# Altium PCB ProjectY_PCB.PcbDoc
Units mm, origin at the board's own origin, x right, y up, seen from the top; angles counter-clockwise.
Board outline 30 x 30 mm, 2 copper layers (Top Layer, Bottom Layer), stack 1.51 mm thick; 9 components, 7 nets, 26 pads, 0 vias.
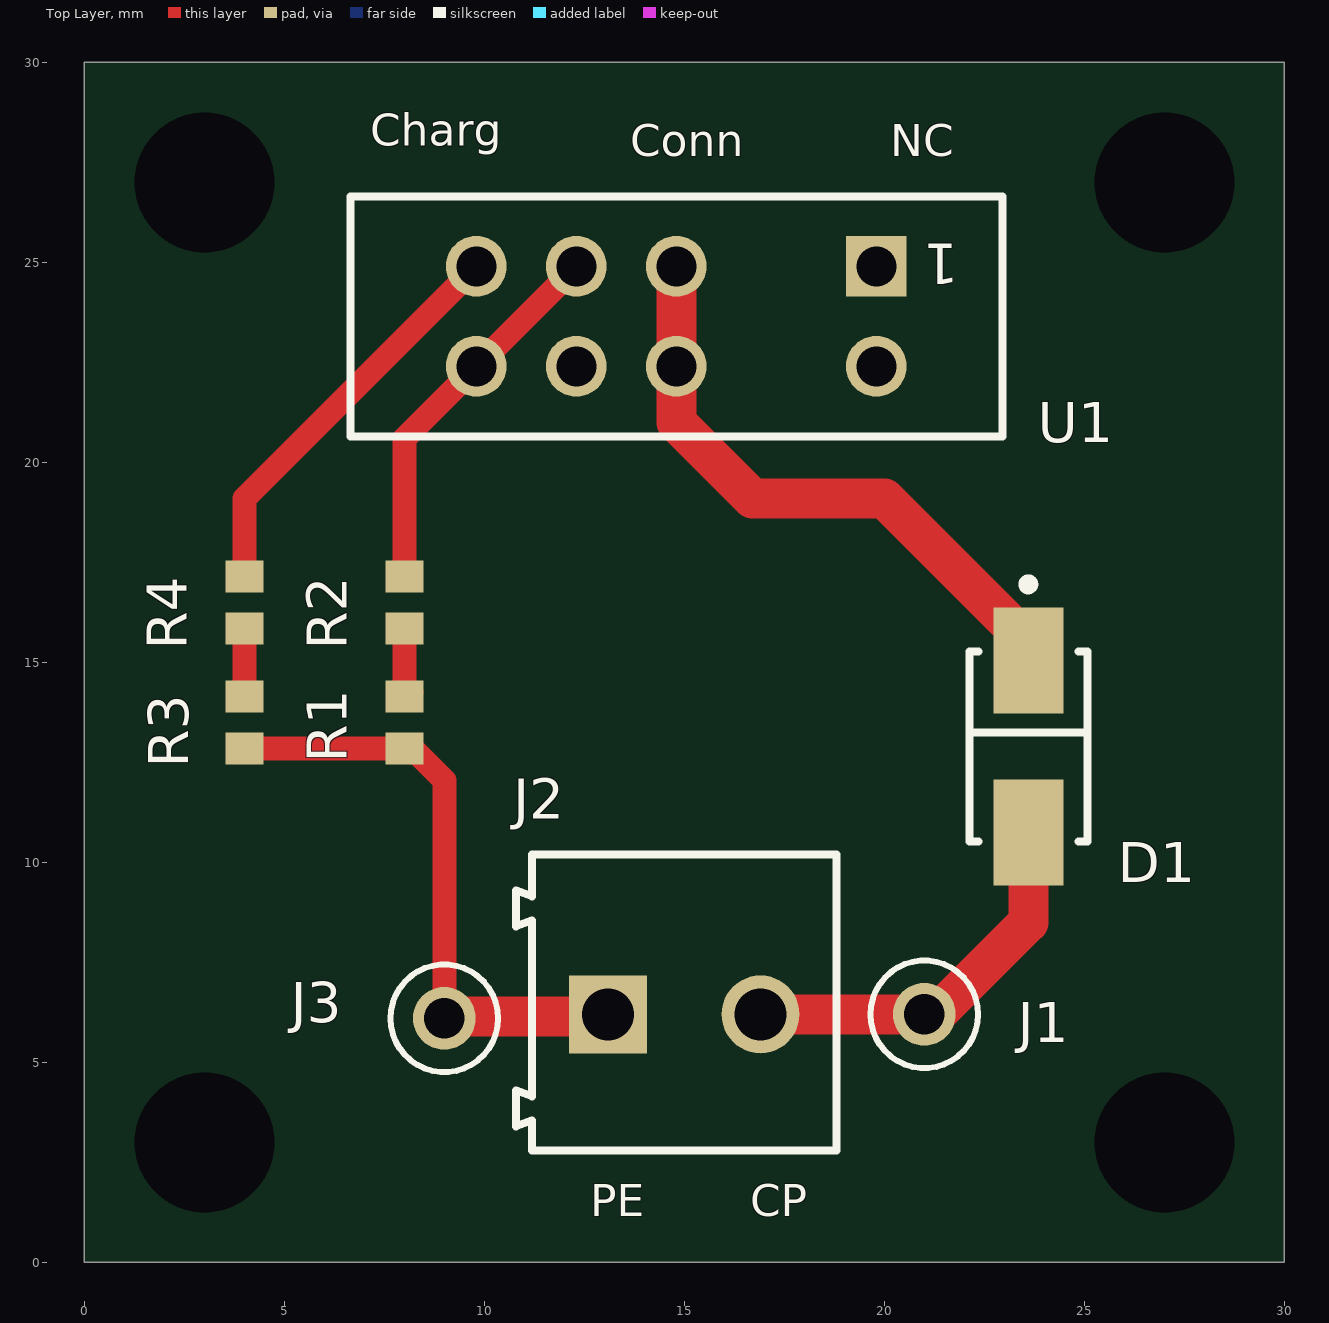
[diagram p0: Top Layer view]
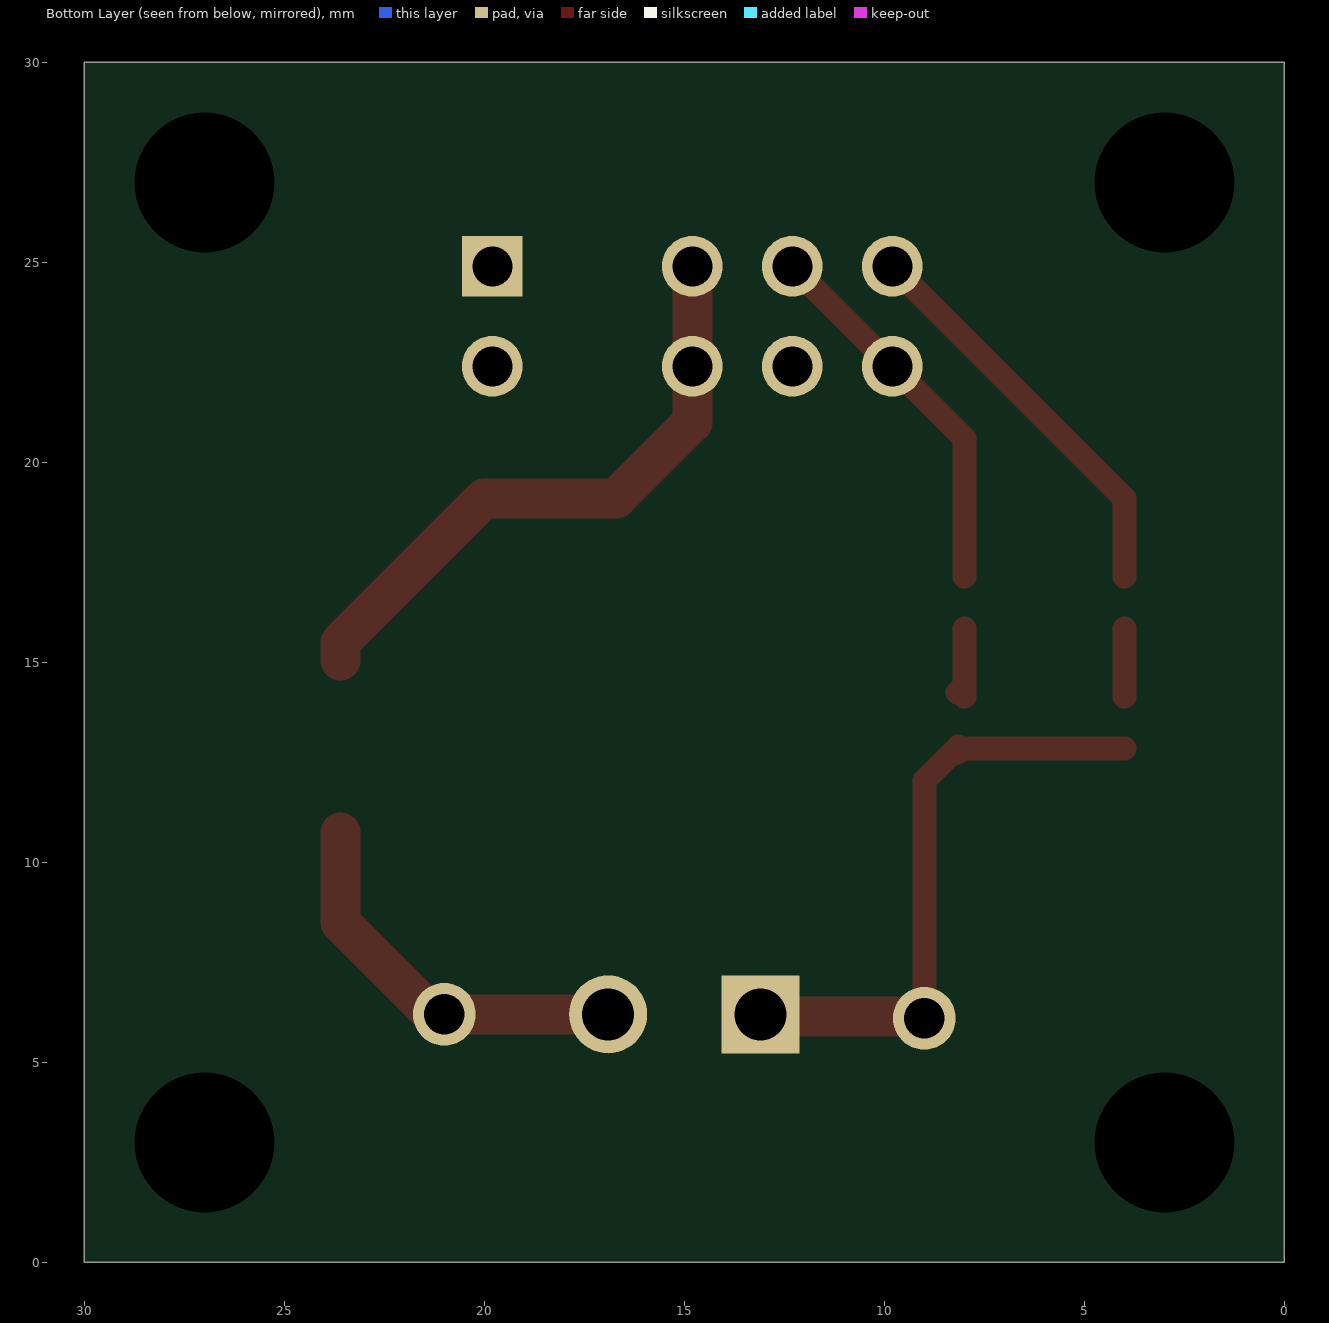
[diagram p1: Bottom Layer view, seen from below]
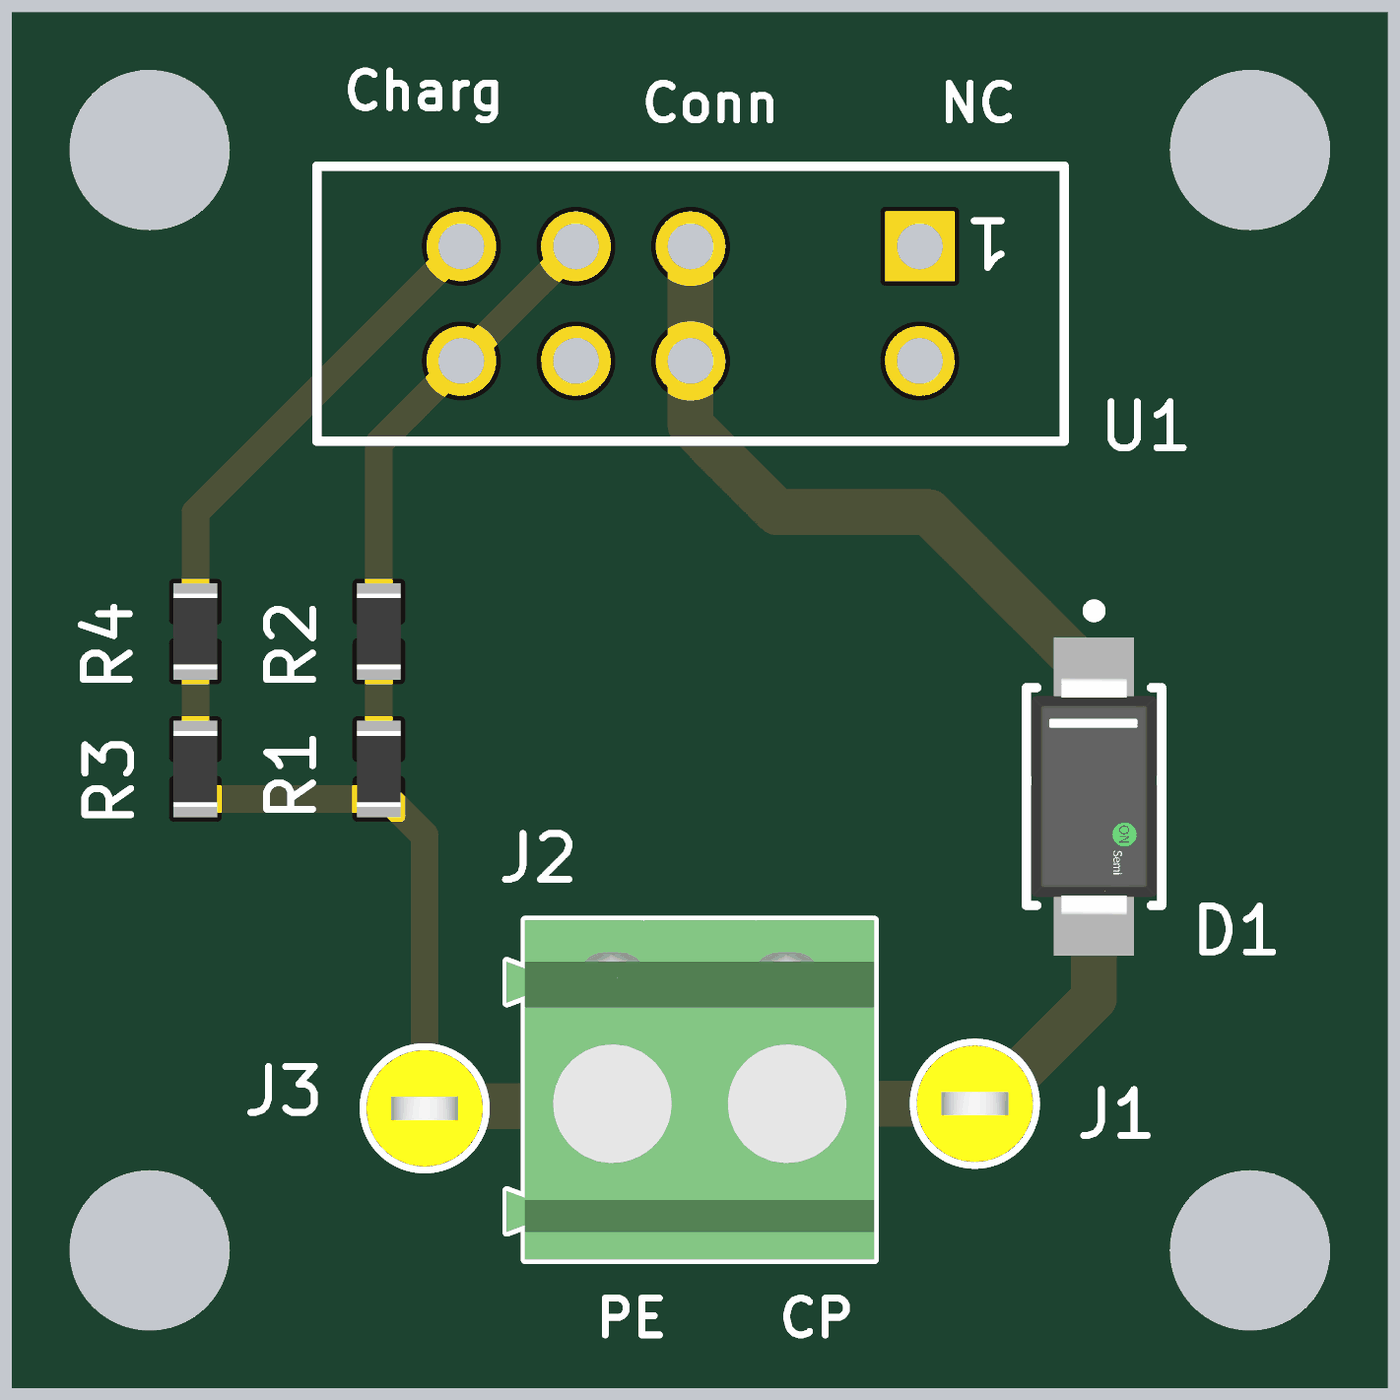
[diagram p2: 3D render of the assembled board from above, using the file's embedded part models]

## Layer stack, top to bottom
Top Solder: solder mask 0.0254, SM-001, Dk 4
Top Layer: signal copper 0.035
Dielectric 1: core 1.44, Core-043, Dk 4.3
Bottom Layer: signal copper 0.035
Bottom Solder: solder mask 0.0254, SM-001, Dk 4

## Board outline
0,0 30,0 30,30 0,30

## Design rules (kind name [scope] priority, off if disabled: settings)
AcuteAngle [All] p1: minimum=4.50000000000000E+0001 checktracksonly=FALSE
BoardOutlineClearance [All] p1: gap=0.2 ignorepadtopadclearanceinfootprint=FALSE
Clearance Clearance_1 [InNet('NO') vs InNet('NC')Or InNet('C')] p1: gap=1.1 ignorepadtopadclearanceinfootprint=FALSE
Clearance Clearance_2 [InNet('NC') vs InNet('NO') OR InNet('C')] p2: gap=1.1 ignorepadtopadclearanceinfootprint=FALSE
Clearance Clearance_3 [InNet('C') vs InNet('NO')OR InNet('NC')] p3: gap=1.1 ignorepadtopadclearanceinfootprint=FALSE
Clearance [All] p4: gap=0.2 ignorepadtopadclearanceinfootprint=FALSE
ComponentClearance [All] p1: gap=-2 collisioncheckmode=3 verticalgap=0.5 showdistances=FALSE
DiffPairsRouting [All] p1: maxlimit=0.5 minlimit=0.15 mostfreqgap=0.2 toplayer_minwidth=0.15 toplayer_maxwidth=0.5 toplayer_prefwidth=0.2 bottomlayer_minwidth=0.15 bottomlayer_maxwidth=0.5 bottomlayer_prefwidth=0.2 maxuncoupledlength=10
Height [All] p1: minheight=0 maxheight=40 prefheight=10
HoleSize [All] p1: absolutevalues=TRUE maxlimit=5 minlimit=0.2 maxpercent=80.000 minpercent=20.000
HoleToHoleClearance [All] p1: gap=0.2 allowstackedmicrovias=TRUE
MinimumAnnularRing [All] p1: minimumring=0.2
MinimumSolderMaskSliver [All] p1: minsoldermaskwidth=0.2
PlaneClearance [All] p1: clearance=0.5
PlaneConnect [All] p1: pad.planeconnectstyle=Relief pad.reliefexpansion=0.3 pad.reliefentries=4 pad.reliefconductorwidth=0.3 pad.reliefairgap=0.3 via.planeconnectstyle=Direct via.reliefexpansion=0.5 via.reliefentries=4 via.reliefconductorwidth=0.5 via.reliefairgap=0.3
PolygonConnect [All] p1: thpad.connectstyle=Relief thpad.reliefconductorwidth=0.3 thpad.reliefentries=4 thpad.polygonreliefangle="90 Angle" thpad.airgapwidth=0.3 smdpad.connectstyle=Relief smdpad.reliefconductorwidth=0.3 smdpad.reliefentries=4 smdpad.polygonreliefangle="90 Angle" smdpad.airgapwidth=0.3 via.connectstyle=Direct via.reliefconductorwidth=0.254 via.reliefentries=4 via.polygonreliefangle="90 Angle" via.airgapwidth=0.254
RoutingCorners [All] p1: cornerstyle=45-Degree minsetback=0.2 maxsetback=3
RoutingVias [All] p1: holewidth=0.3 width=0.7 viastyle="Through Hole" minholewidth=0.3 minwidth=0.7 maxholewidth=2.5 maxwidth=3
SMDEntry [All] p1: side=TRUE corner=TRUE anyangle=FALSE
SMDNeckDown [All] p1: percent=80.000
SMDToCorner [All] p1: distance=59055
SilkToSilkClearance [All] p1: silktosilkclearance=0.2
SilkToSolderMaskClearance [IsPad] p1: minsilkscreentomaskgap=0.2 clearancetoexposedcopper=TRUE
SolderMaskExpansion SolderMaskExpansion_4vias [IsVia] p1: expansion=0.102 istentingtop=TRUE
SolderMaskExpansion SolderMaskExpansion_general [All] p2: expansion=0.102 istentingtop=FALSE
Width [All] p1: maxlimit=5 minlimit=0.2 preferedwidth=0.2
19 further rules are at their usual default settings.

## Classes and differential pairs
component class Block_Diagram: D1 J1 J2 J3 R1 R3 R4 U1

## Components (designator, comment, footprint, x,y, rotation, side; value= is the part's Value field where it differs from the comment)
D1 "SS14" FP-403AE-MFG 23.6,12.9 r90 top
J1 "5004" FP-5004-MFG 21,6.2 r0 top
J2 "691214310002" 691214310002 15,6.5 r0 top
J3 "5004" FP-5004-MFG 9,6.1 r0 top
R1 "2.7k" RESC1608X05N 8,13.5 r90 top
R2 "47" RESC1608X05N 8,16.5 r90 top
R3 "1.2k" RESC1608X05N 4,13.5 r90 top
R4 "100" RESC1608X05N 4,16.5 r90 top
U1 "SS-23E06-G5" SS-23E06-G5 14.8,23.65 r180 top

## Footprints (in the part's own frame and the unit in brackets; to place one, negate y for a bottom-side part, rotate by r counter-clockwise, add the part's x,y. Pads: shape width x height; smd on the part's side, far side on the other; paste and mask are expansions set on the pad)
691214310002 [mm] "3,81mm - Horizontal wire entry - Rising cage clamp - 02p"
  rect 1.95x1.95 hole 1.3: 1(-1.905,-0.3)
  round 1.95 hole 1.3: 2(1.905,-0.3)
  silkscreen extent -4.2,-3.7 3.8,3.7, body extent -4.21,-3.7 3.81,3.7, height 8.55
FP-403AE-MFG [mm]
  rect 2.65x1.75 smd paste+0 mask+0: 1(-2.15,0) 2(2.15,0)
  silkscreen extent -2.37,-1.48 4.17,1.48, body extent -3.57,-1.58 3.57,1.58, height 0.25
FP-5004-MFG [mm]
  round 1.57 hole 1.02 paste-1000 mask+0: 1(0,0)
  silkscreen extent -1.35,-1.34 1.35,1.34, body extent -1.45,-1.45 1.45,1.45, height 0.25
RESC1608X05N [mm] "Chip Resistor, 2-Leads, Body 1,58x0,85mm, IPC Medium Density"
  rect 0.8x0.95 smd: 1(-0.65,0) 2(0.65,0)
  body extent -0.82,-0.48 0.82,0.48, height 0.5
SS-23E06-G5 [mm] "Slide sw, DP3T"
  rect 1.52x1.52 hole 1: 1(-5,-1.25)
  round 1.52 hole 1: 2(2.5,-1.25) 3(5,-1.25) 12(-5,1.25) 22(2.5,1.25) 32(5,1.25) C1(0,-1.25) C2(0,1.25)
  silkscreen extent -8.15,-3 8.15,3, body extent -8.15,-3 8.15,3, height 8

## Part data
D1: library part CMP-2000-04943-2, "DIODE SCHOTTKY 40V 1A SMA", Forward Current=1A, Manufacturer="ON Semiconductor", Max Junction Temp=+125°C, Max Repetitive Reverse Voltage=40V, Max Surge Forward Current=40A, Package=403AE, Peak Reverse Current=0.2mA, Temperature="-65°C to +125°C", Temperature Range Low=-65°C, Automotive=No, Category=Diode, ComponentLink2Description=Datasheet, ComponentLink2URL=https://www.onsemi.com/pub/Collateral/SS19-D.PDF, Device Class L1="Discrete Semiconductors", Device Class L2=Diodes, Device Class L3="Schottky Diodes", Digikey Description="DIODE SCHOTTKY 40V 1A SMA", Height=2.5mm, Lead Free=Yes, Manufacturer Part Number=SS14, Mouser Description="Schottky Diodes & Rectifiers SMA 40V 1.0A", Octopart=https://octopart.com/ss14-on+semiconductor-29205033, RoHS=TRUE, Standoff Height=0.05mm, Temperature Range High=+125°C
J1 J3: library part CMP-2000-05575-2, "PC TEST POINT MINIATURE YELLOW", Manufacturer=Keystone, Automotive=No, Category=Conn, ComponentLink2Description=Datasheet, ComponentLink2URL=https://www.keyelco.com/product-pdf.cfm?p=1313, Contact Material=Silver, Device Class L1=Connectors, Device Class L2=unset, Device Class L3=unset, Digikey Description="PC TEST POINT MINIATURE YELLOW", Height=4.72mm, Is Female=yes, Lead Free=Yes, Manufacturer Part Number=5004, Mouser Description="TEST POINT PC MINI .040\"D YELLOW", Number Of Contacts=1, Octopart=https://octopart.com/5004-keystone-28591, Package=5004, RoHS=TRUE
J2: library part CMP-1502-02498-1, "Serie 2143 - 3.81 mm Horizontal Cable Entry with Rising Cage Clamp WR-TBL, 2 pin", Manufacturer="Wurth Elektronik", Operating Temperature=-40to105degC, Datasheet URL=http://katalog.we-online.de/em/datasheet/6912143100xx.pdf, Manufacturer URL=http://www.we-online.de, Mounting Technology=THT, Package Reference=691214310002, Packaging=Box, Part Number=691214310002, Pin Number=2, Pitch=3.81mm, Publisher=WurthElektronik
R1 R2 R3 R4: library part RES_0603, "22 kOhm 0603 1/4W SMD Resistor"
U1: "High-Speed CAN Transceiver, /  1 Mb/s, 4.5 to 5.5 V, 8-Pin SOIC (SN), Industrial Temperature, RoHS, Tube", Manufacturer=Microchip, ComponentLink1Description="Manufacturer URL", ComponentLink1URL=http://www.microchip.com/, ComponentLink2Description=Datasheet, ComponentLink2URL=http://ww1.microchip.com/downloads/en/DeviceDoc/21667f.pdf, ComponentLink3Description="Package Specification", ComponentLink3URL=http://www.microchip.com/stellent/groups/techpub_sg/documents/packagingspec/en012702.pdf, DatasheetVersion="Rev. F, 07/2010", Mounting Technology="Surface Mount", PackageDescription="8-Pin Small Outline Integrated Circuit, Body 4.9 x 3.9 mm, Pitch 1.27 mm", PackageReference=SN8, RoHSCompliant=true

## Free pads (board coordinates)
  round 1 hole 3.5 unplated: ""(3,3) ""(3,27) ""(27,3) ""(27,27)

## Nets (pads, with @x,y where several pads share a name; then routed paths per layer and width w, separated by ;. In a path a pad name is that pad's centre, name@x,y a point inside that pad or via, vN(x,y) a via of type N, cw(c..) or ccw(c..) an arc to the next point about the centre after c; other vN are vias at no path point)
CP: D1.1 J1.1 J2.2 | length 9.9
  Top Layer w1: J2.2 21.3,6.2 23.6,8.5 D1.1
NetD1_2: D1.2 U1.C1 U1.C2 | length 15.4
  Top Layer w1: U1.C1 U1.C2 14.8,21 16.7,19.1 20,19.1 23.6,15.5 D1.2
NetR1_2: R1.2 R2.1 | length 1.9
  Top Layer w0.6: R1.2 R1.2@8,14.25 ; R2.1 R1.2@8,14.25 ; R1.2@8.175,14.25 R1.2@8,14.25
NetR2_2: R2.2 U1.2 U1.32 | length 9.5
  Top Layer w0.6: R2.2 8,20.6 U1.32 U1.2
NetR3_2: R3.2 R4.1 | length 1.7
  Top Layer w0.6: R3.2 R4.1
NetR4_2: R4.2 U1.3 | length 10.2
  Top Layer w0.6: R4.2 4,19.1 U1.3
PE: J2.1 J3.1 R1.1 R3.1 | length 15.3
  Top Layer w0.6: R3.1 R1.1 ; R1.1@8.15,12.9 8.15,12.775 8.175,12.75 8.3,12.75 9,12.05 J3.1
  Top Layer w1: J3.1@9,6.15 13.045,6.15 J2.1
pads on no net: U1.1 U1.12 U1.22

## Silkscreen, mask and mechanical layers (free items; w line width, h text height)
Top Overlay:
  text "Charg" at 7.15,27.917 h0.8
  text "Conn" at 13.65,27.65 h0.8
  text "NC" at 20.15,27.65 h0.8
  text "PE" at 12.65,1.15 h0.8
  text "CP" at 16.65,1.15 h0.8
Board_Outline (Mech20):
  the board outline again, w0.15

## Text inside footprints (layer, text, board x,y; h text height)
U1: Top Overlay "1" at 21.864,25.466 h1.02 r180